# Altium PCB 2 Layers PCB.PcbDoc (part 2 of 2)
Units mm, origin at the board's own origin, x right, y up, seen from the top; angles counter-clockwise.
Board outline 126.36 x 110.87 mm, 2 copper layers (Top Layer, Bottom Layer), stack 1.569 mm thick; 108 components, 114 nets, 540 pads, 148 vias.
Unrouted connection lines stored in the file: 192.
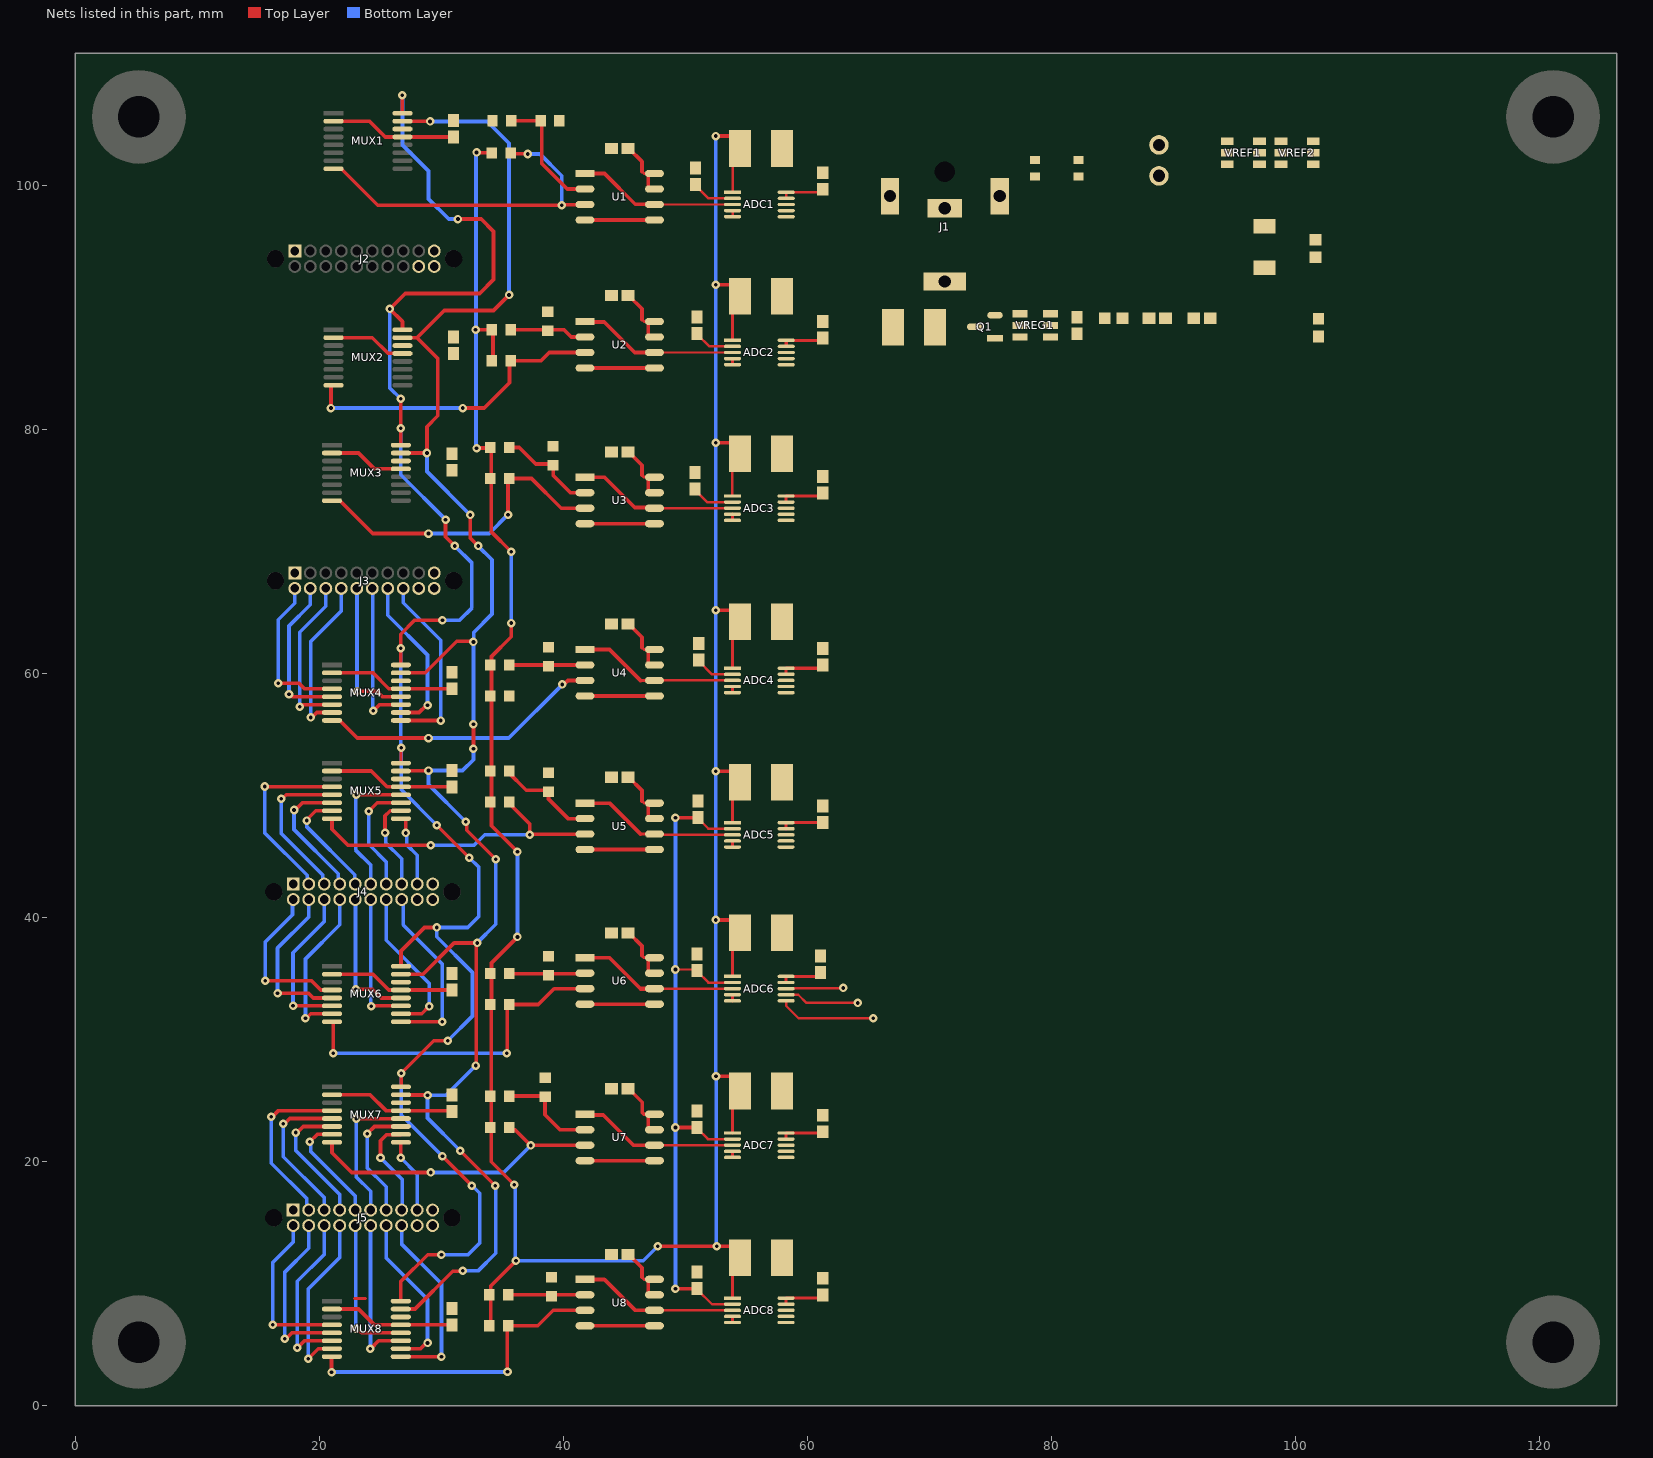
[diagram p2: the nets of this part, all layers, seen from the top]

## Via types
v1: diameter 0.7, hole 0.3, Top Layer to Bottom Layer, 148 vias

## Nets (pads, with @x,y where several pads share a name; then routed paths per layer and width w, separated by ;. In a path a pad name is that pad's centre, name@x,y a point inside that pad or via, vN(x,y) a via of type N, cw(c..) or ccw(c..) an arc to the next point about the centre after c; other vN are vias at no path point) (continued)
D1: MUX1.16 MUX2.16 MUX3.16 MUX4.16 MUX5.16 MUX6.16 MUX7.16 MUX8.16 | length 148.9
  Top Layer w0.25: MUX5.16@26.694,52.682 26.716,52.682 v1(26.716,53.939)
  Top Layer w0.3: v1(26.67,82.55) v1(26.67,80.137) 26.67,78.775 MUX3.16@26.693,78.752 ; MUX8.16@26.686,8.574 26.686,10.176 28.891,12.381 v1(30.018,12.381) ; MUX4.16@26.693,60.729 26.67,60.752 v1(26.67,62.103) 26.67,63.246 27.813,64.389 v1(30.099,64.389) ; MUX7.16@26.694,26.141 26.724,26.171 v1(26.724,27.251) 29.391,29.918 v1(30.534,29.918) ; MUX6.16@26.694,36.029 26.694,37.28 28.621,39.207 v1(29.637,39.207) ; v1(26.797,107.442) 26.797,105.987 MUX1.16@26.82,105.964 ; MUX2.16@26.82,88.211 26.82,88.877 v1(25.781,89.916) 27.051,91.186 33.147,91.186 34.29,92.329 34.29,96.266 33.274,97.282 v1(31.369,97.282) ; v1(29.637,47.589) v1(32.304,44.922) ; v1(30.099,20.447) v1(32.512,18.034) ; v1(30.353,72.644) 30.353,71.247 v1(31.115,70.485)
  Bottom Layer w0.3: v1(25.781,89.916) 25.781,83.439 v1(26.67,82.55) ; v1(26.67,62.103) 26.693,62.08 26.693,53.962 v1(26.716,53.939) 26.716,50.51 v1(29.637,47.589) ; v1(26.67,80.137) 26.67,76.327 v1(30.353,72.644) ; v1(26.724,27.251) 26.724,23.822 v1(30.099,20.447) ; v1(26.797,107.442) 26.82,107.419 26.82,103.363 28.956,101.227 28.956,98.933 30.607,97.282 v1(31.369,97.282) ; v1(30.018,12.381) 32.193,12.381 33.147,13.335 33.147,17.418 32.531,18.034 v1(32.512,18.034) ; v1(30.099,64.389) 31.496,64.389 32.512,65.405 32.512,69.088 v1(31.115,70.485) ; v1(30.534,29.918) 32.566,31.95 32.566,35.506 29.637,38.435 v1(29.637,39.207) 32.177,39.207 33.066,40.096 33.066,44.16 v1(32.304,44.922)
D2: MUX1.15 MUX2.15 MUX3.15 MUX4.15 MUX5.15 MUX6.15 MUX7.15 MUX8.15 | length 152.6
  Top Layer w0.25: MUX6.15@26.694,35.379 MUX6.15@26.71,35.395 ; v1(32.82,27.886) v1@32.88,27.946 ; v1@32.88,37.877 v1(32.939,37.937)
  Top Layer w0.3: MUX8.15@26.686,7.924 27.847,7.924 30.95,11.027 31.728,11.027 v1(31.75,11.049) ; MUX4.15@26.693,60.079 28.683,60.079 31.267,62.663 32.587,62.663 v1(32.639,62.611) ; MUX3.15@26.693,78.102 26.695,78.103 28.827,78.103 v1(28.829,78.105) 28.829,80.264 29.718,81.153 29.718,85.852 28.009,87.561 ; MUX7.15@26.694,25.491 26.709,25.476 v1@28.86,25.476 ; MUX6.15@26.694,35.379 28.496,35.379 31.054,37.937 v1(32.939,37.937) ; MUX5.15@26.694,52.032 26.71,52.048 28.934,52.048 v1(28.956,52.07) ; MUX2.15@26.82,87.561 28.009,87.561 ; MUX1.15@26.82,105.314 26.835,105.298 29.068,105.298 v1(29.083,105.283) ; v1(31.55,20.901) v1(34.417,18.034) ; v1(32.004,47.879) 32.081,47.802 32.081,47.178 v1(34.463,44.795) ; v1(32.385,73.025) 32.385,71.134 33.02,70.499 v1(33.02,70.485) ; v1(32.639,53.848) v1(32.639,55.88) ; v1@32.88,27.946 v1@32.88,37.877 ; v1(35.56,91.059) 34.29,89.789 30.237,89.789 28.009,87.561
  Bottom Layer w0.3: v1(28.829,78.105) 28.829,76.581 v1(32.385,73.025) ; v1(29.083,105.283) 33.782,105.283 35.56,103.505 v1(35.56,91.059) ; v1(31.55,20.901) 28.875,23.576 v1(28.875,25.462) 30.395,25.462 v1(32.82,27.886) ; v1(31.75,11.049) 33.02,11.049 34.471,12.5 v1@34.471,17.98 ; v1(32.004,47.879) 28.956,50.927 v1(28.956,52.07) 31.75,52.07 32.639,52.959 v1(32.639,53.848) ; v1(32.639,55.88) v1(32.639,62.611) 32.677,62.649 32.677,63.411 34.163,64.897 34.163,69.342 v1(33.02,70.485) ; v1(32.939,37.937) 34.463,39.461 v1(34.463,44.795)
D3: ADC2.6
D4: ADC4.6
D5: ADC6.6 | length 8
  Top Layer w0.2: ADC6.6@58.274,33.191 58.274,32.785 59.309,31.75 v1(65.405,31.75)
D6: ADC8.6
D7: ADC7.6
D8: ADC5.6
D9: ADC3.6
D10: ADC1.6
E1: J3.2 MUX4.4 | length 13
  Top Layer w0.25: MUX4.4@21.042,58.779 MUX4.4@21.104,58.779
  Top Layer w0.3: v1(16.629,59.22) 18.34,59.22 18.781,58.779 MUX4.4@21.042,58.779
  Bottom Layer w0.3: v1(16.629,59.22) 16.629,64.427 17.994,65.792 J3.2@17.994,67.002
E2: J3.4 MUX4.5 | length 13
  Top Layer w0.25: v1(17.518,58.331) 17.604,58.331 17.806,58.129
  Top Layer w0.3: 17.806,58.129 MUX4.5@21.042,58.129
  Bottom Layer w0.3: v1(17.518,58.331) 17.518,63.919 19.264,65.665 J3.4@19.264,67.002
E3: J3.6 MUX4.6 | length 13.3
  Top Layer w0.25: v1(18.407,57.315) 18.493,57.315 v1@18.657,57.479
  Top Layer w0.3: v1@18.657,57.479 MUX4.6@21.042,57.479
  Bottom Layer w0.3: v1(18.407,57.315) 18.407,63.411 20.534,65.538 J3.6@20.534,67.002
E4: J3.8 MUX4.7 | length 13.5
  Top Layer w0.25: v1(19.296,56.426) v1@19.382,56.426
  Top Layer w0.3: v1@19.382,56.426 19.785,56.829 MUX4.7@21.042,56.829
  Bottom Layer w0.3: v1(19.296,56.426) 19.296,62.649 21.804,65.157 J3.8@21.804,67.002
E5: J3.10 MUX4.12 | length 12.2
  Top Layer w0.3: v1(23.101,58.585) 24.732,58.585 25.188,58.129 MUX4.12@26.693,58.129
  Bottom Layer w0.25: J3.10@23.074,67.002 J3.10@23.088,66.989 ; v1@23.088,58.598 v1(23.101,58.585)
  Bottom Layer w0.3: v1@23.088,58.598 J3.10@23.088,66.989
E6: J3.12 MUX4.11 | length 12.5
  Top Layer w0.25: v1(24.438,56.969) v1@24.444,56.969
  Top Layer w0.3: v1@24.444,56.969 24.954,57.479 MUX4.11@26.693,57.479
  Bottom Layer w0.25: J3.12@24.344,67.002 J3.12@24.391,66.955 ; v1@24.391,57.016 v1(24.438,56.969)
  Bottom Layer w0.3: v1@24.391,57.016 J3.12@24.391,66.955
E7: J3.14 MUX4.10 | length 13.4
  Top Layer w0.25: v1@28.788,57.434 v1(28.874,57.434)
  Top Layer w0.3: MUX4.10@26.693,56.829 28.183,56.829 v1@28.788,57.434
  Bottom Layer w0.3: J3.14@25.614,67.002 25.614,64.81 28.874,61.55 v1(28.874,57.434)
E8: J3.16 MUX4.9 | length 15.4
  Top Layer w0.25: v1@29.957,56.179 v1(29.964,56.172)
  Top Layer w0.3: MUX4.9@26.693,56.179 v1@29.957,56.179
  Bottom Layer w0.3: J3.16@26.884,67.002 26.884,65.826 29.964,62.746 v1(29.964,56.172)
F1: J4.3 MUX5.4 | length 15
  Top Layer w0.25: v1(15.54,50.764) v1@15.572,50.732
  Top Layer w0.3: v1@15.572,50.732 MUX5.4@21.043,50.732
  Bottom Layer w0.25: J4.3@19.008,42.893 J4.3@19.138,42.763
  Bottom Layer w0.3: v1(15.54,50.764) 15.54,46.954 19.008,43.486 J4.3@19.008,42.893
F2: J4.5 MUX5.5 | length 12.7
  Top Layer w0.25: v1(16.884,49.756) v1@16.97,49.756
  Top Layer w0.3: v1@16.97,49.756 17.296,50.082 MUX5.5@21.043,50.082
  Bottom Layer w0.25: J4.5@20.278,42.893 J4.5@20.408,42.763
  Bottom Layer w0.3: v1(16.884,49.756) 16.884,46.9 20.278,43.506 J4.5@20.278,42.893
F3: J4.7 MUX5.6 | length 11
  Top Layer w0.25: v1(17.932,48.835) v1@18.018,48.835
  Top Layer w0.3: v1@18.018,48.835 18.616,49.432 MUX5.6@21.043,49.432
  Bottom Layer w0.25: J4.7@21.548,42.893 J4.7@21.678,42.763
  Bottom Layer w0.3: v1(17.932,48.835) 17.932,47.23 21.548,43.613 J4.7@21.548,42.893
F4: J4.9 MUX5.7 | length 9.3
  Top Layer w0.25: v1(18.969,47.97) v1@18.969,48.032
  Top Layer w0.3: v1@18.969,48.032 19.72,48.782 MUX5.7@21.043,48.782
  Bottom Layer w0.25: v1(18.969,47.97) v1@18.986,47.954 ; J4.9@22.911,42.801 J4.9@22.948,42.763
  Bottom Layer w0.3: v1@18.986,47.954 18.986,47.446 22.911,43.521 J4.9@22.911,42.801
F5: J4.11 MUX5.12 | length 11.5
  Top Layer w0.3: v1(23.035,50.082) MUX5.12@26.694,50.082
  Bottom Layer w0.25: v1@22.98,50.027 v1(23.035,50.082)
  Bottom Layer w0.3: v1@22.98,50.027 22.98,45.565 24.218,44.327 J4.11@24.218,42.763
F6: J4.13 MUX5.11 | length 9.5
  Top Layer w0.3: v1(24.049,48.732) 24.749,49.432 MUX5.11@26.694,49.432
  Bottom Layer w0.3: v1(24.049,48.732) 24.049,46.019 25.488,44.581 J4.13@25.488,42.763
F7: J4.15 MUX5.10 | length 7.6
  Top Layer w0.3: v1(25.393,46.962) 25.393,48.36 25.814,48.782 MUX5.10@26.694,48.782
  Bottom Layer w0.25: v1(25.393,46.962) v1@25.454,46.901
  Bottom Layer w0.3: v1@25.454,46.901 25.454,46.139 26.758,44.835 J4.15@26.758,42.763
F8: J4.17 MUX5.9 | length 6.2
  Top Layer w0.25: MUX5.9@26.694,48.132 MUX5.9@27.097,48.132
  Top Layer w0.3: v1(27.097,46.954) MUX5.9@27.097,48.132
  Bottom Layer w0.25: v1(27.097,46.954) v1@27.159,46.893
  Bottom Layer w0.3: v1@27.159,46.893 27.159,46.004 28.028,45.134 J4.17@28.028,42.763
G1: J4.2 MUX6.4 | length 13.4
  Top Layer w0.3: v1(15.563,34.825) 19.373,34.825 20.119,34.079 MUX6.4@21.043,34.079
  Bottom Layer w0.25: J4.2@17.8,41.425 J4.2@17.868,41.493
  Bottom Layer w0.3: v1(15.563,34.825) 15.563,38.021 17.8,40.258 J4.2@17.8,41.425
G2: J4.4 MUX6.5 | length 13.4
  Top Layer w0.3: v1(16.579,33.809) 19.119,33.809 19.499,33.429 MUX6.5@21.043,33.429
  Bottom Layer w0.25: J4.4@19.133,41.488 J4.4@19.138,41.493
  Bottom Layer w0.3: v1(16.579,33.809) 16.579,37.513 19.133,40.068 J4.4@19.133,41.488
G3: J4.6 MUX6.6 | length 13
  Top Layer w0.25: v1(17.849,32.793) v1@17.863,32.779
  Top Layer w0.3: v1@17.863,32.779 MUX6.6@21.043,32.779
  Bottom Layer w0.3: v1(17.849,32.793) 17.849,37.132 20.408,39.692 J4.6@20.408,41.493
G4: J4.8 MUX6.7 | length 13.2
  Top Layer w0.25: v1(18.865,31.777) v1@18.951,31.777
  Top Layer w0.3: v1@18.951,31.777 19.303,32.129 MUX6.7@21.043,32.129
  Bottom Layer w0.3: v1(18.865,31.777) 18.865,36.624 21.678,39.438 J4.8@21.678,41.493
G5: J4.10 MUX6.12 | length 11.4
  Top Layer w0.3: v1(22.98,34.135) 24.377,34.135 25.083,33.429 MUX6.12@26.694,33.429
  Bottom Layer w0.25: J4.10@22.948,41.493 J4.10@22.964,41.478 ; v1@22.964,34.151 v1(22.98,34.135)
  Bottom Layer w0.3: v1@22.964,34.151 J4.10@22.964,41.478
G6: J4.12 MUX6.11 | length 11.2
  Top Layer w0.25: v1(24.25,32.738) v1@24.291,32.779
  Top Layer w0.3: v1@24.291,32.779 MUX6.11@26.694,32.779
  Bottom Layer w0.25: J4.12@24.218,41.493 J4.12@24.234,41.478 ; v1@24.234,32.754 v1(24.25,32.738)
  Bottom Layer w0.3: v1@24.234,32.754 J4.12@24.234,41.478
G7: J4.14 MUX6.10 | length 12.8
  Top Layer w0.3: MUX6.10@26.694,32.129 28.401,32.129 v1(29.002,32.73)
  Bottom Layer w0.3: J4.14@25.488,41.493 25.488,38.149 29.002,34.635 v1(29.002,32.73)
G8: J4.16 MUX6.9 | length 14.8
  Top Layer w0.3: MUX6.9@26.694,31.479 v1@30.092,31.479
  Bottom Layer w0.25: J4.16@26.758,41.493 J4.16@26.888,41.363
  Bottom Layer w0.3: J4.16@26.888,41.363 26.888,39.416 30.092,36.213 v1(30.092,31.468)
GND: ADC1.4 ADC1.5 ADC2.4 ADC2.5 ADC3.4 ADC3.5 ADC4.4 ADC4.5 ADC5.4 ADC5.5 ADC6.4 ADC6.5 ADC7.4 ADC7.5 ADC8.4 ADC8.5 C1.1 C2.1 C3.1 C4.2 C5.1 C6.2 C7.1 C8.1 C9.1 C10.2 C11.1 C12.2 C13.1 C14.1 C15.1 C16.2 C17.1 C18.2 C19.1 C20.1 C21.1 C22.1 C23.2 C24.2 C26.2 C28.1 C30.1 C31.1 C32.1 C33.1 C34.1 C35.1 C36.1 C37.1 C38.1 C39.1 C40.1 C41.1 C42.1 C43.1 C44.1 C45.1 J1.1 J1.3 J1.4 J2.1 J2.18 J2.19 J2.20 J3.1 J3.18 J3.19 J3.20 J4.1 J4.18 J4.19 J4.20 J5.1 J5.18 J5.19 J5.20 LED1.1 MUX1.14 MUX2.14 MUX3.14 MUX4.14 MUX5.14 MUX6.14 MUX7.14 MUX8.14 Q1.1 R2.1 R3.2 R6.2 R9.2 R12.2 R15.2 R18.2 R21.2 R24.2 R27.2 U1.4 U1.5 U2.4 U2.5 U3.4 U3.5 U4.4 U4.5 U5.4 U5.5 U6.4 U6.5 U7.4 U7.5 U8.4 U8.5 VREG1.2 | length 41.6
  Top Layer w0.2: ADC1.5@53.882,97.478 ADC1.4@53.882,97.978
  Top Layer w0.25: ADC8.5@53.874,6.82 ADC8.4@53.874,7.32 ; ADC7.5@53.874,20.355 ADC7.4@53.874,20.855 ; ADC6.5@53.874,33.191 ADC6.4@53.874,33.691 ; ADC5.5@53.874,45.799 ADC5.4@53.874,46.299 ; ADC4.5@53.874,58.459 ADC4.4@53.874,58.959 ; ADC3.5@53.874,72.582 ADC3.4@53.874,73.082 ; ADC2.5@53.882,85.343 ADC2.4@53.882,85.843
  Top Layer w0.3: U8.4@42.281,6.55 U8.5@46.981,6.55 ; U7.4@42.281,20.085 U7.5@46.981,20.085 ; U6.4@42.281,32.921 U6.5@46.981,32.921 ; U5.4@42.281,45.592 U5.5@46.981,45.592 ; U4.4@42.281,58.189 U4.5@46.981,58.189 ; U3.4@42.281,72.312 U3.5@46.981,72.312 ; U2.4@42.281,85.073 U2.5@46.981,85.073 ; U1.4@42.281,97.208 U1.5@46.981,97.208
H1: J5.3 MUX7.4 | length 14.1
  Top Layer w0.3: v1(16.056,23.695) 16.164,23.695 16.66,24.191 MUX7.4@21.043,24.191
  Bottom Layer w0.3: v1(16.056,23.695) 16.056,19.885 18.985,16.956 18.985,16.187 J5.3@19.13,16.041
H2: J5.5 MUX7.5 | length 12.6
  Top Layer w0.3: v1(17.056,23.12) 17.165,23.12 17.586,23.541 MUX7.5@21.043,23.541
  Bottom Layer w0.3: v1(17.056,23.12) 17.056,20.409 20.4,17.065 J5.5@20.4,16.041
H3: J5.7 MUX7.6 | length 11
  Top Layer w0.3: v1(18.072,22.391) 18.181,22.391 18.681,22.891 MUX7.6@21.043,22.891
  Bottom Layer w0.3: v1(18.072,22.391) 18.072,20.917 21.67,17.319 J5.7@21.67,16.041
H4: J5.9 MUX7.7 | length 9.2
  Top Layer w0.3: v1(19.215,21.629) 19.827,22.241 MUX7.7@21.043,22.241
  Bottom Layer w0.3: v1(19.215,21.629) 19.292,21.553 19.292,20.84 22.94,17.192 J5.9@22.94,16.041
H5: J5.11 MUX7.12 | length 11.7
  Top Layer w0.3: v1(23.018,23.526) 26.679,23.526 MUX7.12@26.694,23.541
  Bottom Layer w0.3: v1(23.018,23.526) 23.018,18.765 24.21,17.573 J5.11@24.21,16.041
H6: J5.13 MUX7.11 | length 9.9
  Top Layer w0.3: v1(23.922,22.287) 24.526,22.891 MUX7.11@26.694,22.891
  Bottom Layer w0.3: v1(23.922,22.287) 23.922,19.512 25.48,17.954 J5.13@25.48,16.041
H7: J5.15 MUX7.10 | length 8.3
  Top Layer w0.3: v1(25.019,20.32) 25.019,21.717 25.528,22.226 26.679,22.226 MUX7.10@26.694,22.241
  Bottom Layer w0.3: v1(25.019,20.32) 26.797,18.542 26.797,16.088 J5.15@26.75,16.041
H8: J5.17 MUX7.9 | length 6.1
  Top Layer w0.3: v1(26.67,20.32) 26.67,21.567 MUX7.9@26.694,21.591
  Bottom Layer w0.3: v1(26.67,20.32) 28.02,18.97 J5.17@28.02,16.041
I1: J5.2 MUX8.4 | length 13.7
  Top Layer w0.3: v1(16.186,6.624) MUX8.4@21.035,6.624
  Bottom Layer w0.3: v1(16.186,6.624) 16.186,11.741 17.86,13.415 J5.2@17.86,14.771
I2: J5.4 MUX8.5 | length 14.1
  Top Layer w0.3: v1(17.183,5.5) 17.292,5.5 17.766,5.974 MUX8.5@21.035,5.974
  Bottom Layer w0.3: v1(17.183,5.5) 17.183,10.96 19.13,12.907 J5.4@19.13,14.771
I3: J5.6 MUX8.6 | length 14
  Top Layer w0.3: v1(18.199,4.738) 18.785,5.324 MUX8.6@21.035,5.324
  Bottom Layer w0.3: v1(18.199,4.738) 18.199,10.198 20.4,12.399 J5.6@20.4,14.771
I4: J5.8 MUX8.7 | length 14.3
  Top Layer w0.3: v1(19.088,3.849) 19.913,4.674 MUX8.7@21.035,4.674
  Bottom Layer w0.3: v1(19.088,3.849) 19.088,9.563 21.67,12.145 J5.8@21.67,14.771
I5: J5.10 MUX8.12 | length 13.2
  Top Layer w0.25: 22.9,8.791 23.789,8.791
  Top Layer w0.3: v1(23.041,6.296) 23.149,6.296 23.471,5.974 MUX8.12@26.686,5.974
  Bottom Layer w0.3: J5.10@22.94,14.771 22.991,14.721 22.991,6.346 v1(23.041,6.296)
I6: J5.12 MUX8.11 | length 12.9
  Top Layer w0.3: v1(24.193,4.654) 24.863,5.324 MUX8.11@26.686,5.324
  Bottom Layer w0.3: v1(24.193,4.654) 24.202,4.663 24.202,14.763 J5.12@24.21,14.771
I7: J5.14 MUX8.10 | length 13.4
  Top Layer w0.3: MUX8.10@26.686,4.674 28.299,4.674 28.767,5.142 v1(28.875,5.142)
  Bottom Layer w0.3: J5.14@25.48,14.771 25.48,12.112 28.875,8.717 v1(28.875,5.142)
I8: J5.16 MUX8.9 | length 15.5
  Top Layer w0.3: MUX8.9@26.686,4.024 26.699,4.011 30.005,4.011 v1(30.018,3.999)
  Bottom Layer w0.3: J5.16@26.75,14.771 26.75,13.255 30.018,9.987 v1(30.018,3.999)
MISO: ADC1.7 ADC2.7 ADC3.7 ADC4.7 ADC5.7 ADC6.7 ADC7.7 ADC8.7 | length 6.1
  Top Layer w0.2: ADC6.7@58.274,33.691 59.273,33.691 59.944,33.02 v1(64.135,33.02)
MOSI: 
NetADC1_1: ADC1.1 ADC2.1 ADC3.1 ADC4.1 ADC5.1 ADC6.1 ADC7.1 ADC8.1 C3.2 C5.2 C9.2 C11.2 C15.2 C17.2 C21.2 C22.2 R5.1 R7.1 R8.1 R10.1 R11.1 R13.1 R14.1 R16.1 R17.1 R19.1 R20.1 R22.1 R23.1 R25.1 R26.1 R28.1 VREF1.1 | length 265.7
  Top Layer w0.2: ADC3.1@53.874,74.582 53.874,77.425 C9.2@54.476,78.027 ; ADC1.1@53.882,99.478 53.882,102.475 C3.2@54.476,103.069
  Top Layer w0.25: ADC8.1@53.874,8.82 53.874,11.536 C22.2@54.476,12.138 ; ADC7.1@53.874,22.355 53.874,25.198 C21.2@54.476,25.8 ; ADC6.1@53.874,35.191 53.874,38.16 C17.2@54.476,38.762 ; ADC5.1@53.874,47.799 53.874,50.525 C15.2@54.476,51.127 ; ADC4.1@53.874,60.459 53.874,63.683 C11.2@54.476,64.285 ; ADC2.1@53.882,87.343 53.882,90.346 C5.2@54.476,90.94
  Top Layer w0.3: v1@32.816,88.207 34.236,88.207 34.24,88.211 R10.1@34.24,85.671 ; v1(32.893,78.486) 32.925,78.518 34.081,78.518 34.113,78.55 34.113,76.01 34.113,71.626 v1(35.732,70.007) ; v1(32.893,102.743) 32.923,102.713 34.21,102.713 R7.1@34.24,102.684 ; R28.1@34.048,6.55 34.048,9.09 34.048,9.811 v1(36.122,11.884) ; v1(35.732,64.165) 35.732,63.037 34.114,61.419 34.114,58.189 34.114,52.032 34.114,49.492 34.114,47.547 v1(36.249,45.412) ; v1(35.995,18.107) 34.106,19.996 34.106,22.813 34.106,25.369 34.11,25.373 34.11,32.889 34.114,32.893 34.114,35.433 34.114,36.292 v1(36.249,38.427) ; v1(47.752,13.081) v1(52.578,13.081) 53.726,13.081 54.476,12.331 C22.2@54.476,12.138 ; v1(52.505,39.824) 53.726,39.824 54.476,39.074 C17.2@54.476,38.762 ; v1(52.505,52.016) 53.726,52.016 54.476,51.266 C15.2@54.476,51.127 ; v1(52.505,65.224) 53.726,65.224 54.476,64.474 C11.2@54.476,64.285 ; v1(52.505,78.94) 53.726,78.94 54.476,78.19 C9.2@54.476,78.027 ; v1(52.505,91.894) 53.726,91.894 54.476,91.144 C5.2@54.476,90.94 ; v1(52.505,104.086) 53.726,104.086 54.476,103.336 C3.2@54.476,103.069 ; v1(52.526,27.014) 53.726,27.014 54.476,26.264 C21.2@54.476,25.8
  Bottom Layer w0.3: v1@32.852,88.162 32.852,78.527 v1(32.893,78.486) ; v1@32.852,88.243 32.852,102.702 v1(32.893,102.743) ; v1(35.732,64.165) v1(35.732,70.007) ; v1(35.995,18.107) 36.058,18.044 v1@36.058,11.948 ; v1(36.122,11.884) 46.555,11.884 v1(47.752,13.081) ; v1(36.249,38.427) v1(36.249,45.412) ; v1(52.505,104.086) v1(52.505,91.894) v1(52.505,78.94) v1(52.505,65.224) v1(52.505,52.016) v1(52.505,39.824) 52.516,39.813 52.516,27.025 v1(52.526,27.014) 52.552,26.988 52.552,13.107 v1(52.578,13.081)
  other v1: 32.811,88.203
NetADC1_2: ADC1.2 ADC2.2 ADC3.2 ADC4.2 ADC5.2 ADC6.2 ADC7.2 ADC8.2 C1.2 C6.1 C7.2 C12.1 C13.2 C18.1 C20.2 C23.1 VREF2.1 | length 73
  Top Layer w0.2: v1(49.203,35.76) 50.908,35.76 C18.1@50.981,35.687 50.981,35.614 51.904,34.691 ADC6.2@53.874,34.691 ; C7.2@50.8,75.142 50.8,75.069 51.787,74.082 ADC3.2@53.874,74.082 ; C1.2@50.854,100.107 50.854,100.034 51.91,98.978 ADC1.2@53.882,98.978 ; C20.2@50.974,22.806 50.974,22.747 51.866,21.855 ADC7.2@53.874,21.855 ; C23.1@50.981,9.61 50.981,9.537 52.198,8.32 ADC8.2@53.874,8.32 ; C6.1@50.981,87.915 50.981,87.842 51.98,86.843 ADC2.2@53.882,86.843 ; C13.2@51.054,48.218 51.054,48.145 51.9,47.299 ADC5.2@53.874,47.299 ; C12.1@51.108,61.118 51.108,61.045 52.194,59.959 ADC4.2@53.874,59.959
  Top Layer w0.3: v1(49.203,9.598) 50.969,9.598 C23.1@50.981,9.61 ; v1(49.203,22.806) C20.2@50.974,22.806 ; v1(49.203,48.206) C13.2@51.042,48.206
  Bottom Layer w0.3: v1(49.203,9.598) v1(49.203,22.806) v1(49.203,35.76) v1(49.203,48.206)
NetADC1_3: ADC1.3 U1.1 U1.6 | length 12.7
  Top Layer w0.2: U1.6@46.955,98.503 46.981,98.478 ADC1.3@53.882,98.478
  Top Layer w0.3: U1.1@42.281,101.018 42.286,101.013 43.386,101.013 45.896,98.503 U1.6@46.955,98.503
NetADC1_9: ADC1.9 ADC1.10 ADC2.9 ADC2.10 ADC3.9 ADC3.10 ADC4.9 ADC4.10 ADC5.9 ADC5.10 ADC6.9 ADC6.10 ADC7.9 ADC7.10 ADC8.9 ADC8.10 C2.2 C4.1 C8.2 C10.1 C14.2 C16.1 C19.2 C24.1 C25.2 C28.2 C29.2 C30.2 C31.2 C32.2 C33.2 C34.2 C35.2 C36.2 C37.2 C38.2 C39.2 C40.2 C41.2 C42.2 C43.2 C44.2 C45.2 L1.2 MUX1.2 MUX1.13 MUX2.2 MUX2.13 MUX3.2 MUX3.13 MUX4.2 MUX4.13 MUX5.2 MUX5.13 MUX6.2 MUX6.13 MUX7.2 MUX7.13 MUX8.2 MUX8.13 R1.2 R4.1 U1.7 U1.8 U2.7 U2.8 U3.7 U3.8 U4.7 U4.8 U5.7 U5.8 U6.7 U6.8 U7.7 U7.8 U8.7 U8.8 VREF1.2 VREF1.3 VREF1.4 VREF1.5 VREF2.4 VREF2.6 | length 137.6
  Top Layer w0.2: ADC1.9@58.282,98.978 ADC1.10@58.282,99.478 61.032,99.478 C4.1@61.281,99.726
  Top Layer w0.25: C45.2@45.308,12.392 C45.2@45.381,12.392 ; C41.2@45.308,38.762 C41.2@45.381,38.762 ; C39.2@45.308,51.516 C39.2@45.381,51.516 ; C37.2@45.308,64.081 C37.2@45.381,64.081 ; C35.2@45.308,78.178 C35.2@45.381,78.178 ; C33.2@45.308,91.005 C33.2@45.381,91.005 ; C31.2@45.308,103.069 C31.2@45.381,103.069 ; 46.456,10.522 46.617,10.36 U8.8@46.981,10.36 ; 46.456,36.893 46.617,36.731 U6.8@46.981,36.731 ; 46.456,49.564 46.617,49.402 U5.8@46.981,49.402 ; 46.456,62.16 46.617,61.999 U4.8@46.981,61.999 ; 46.456,76.283 46.617,76.122 U3.8@46.981,76.122 ; 46.456,89.045 46.617,88.883 U2.8@46.981,88.883 ; 46.456,101.179 46.617,101.018 U1.8@46.981,101.018 ; ADC8.9@58.274,8.32 ADC8.10@58.274,8.82 61.011,8.82 C19.2@61.281,9.09 ; ADC7.9@58.274,21.855 ADC7.10@58.274,22.355 61.18,22.355 C24.1@61.281,22.456 ; ADC6.9@58.274,34.691 ADC6.10@58.274,35.191 60.76,35.191 C14.2@61.087,35.518 ; ADC5.9@58.274,47.299 ADC5.10@58.274,47.799 C16.1@61.281,47.799 ; ADC4.9@58.274,59.959 ADC4.10@58.274,60.459 61.011,60.459 C8.2@61.281,60.729 ; ADC3.9@58.274,74.082 ADC3.10@58.274,74.582 61.029,74.582 C10.1@61.281,74.834 ; ADC2.9@58.282,86.843 ADC2.10@58.282,87.343 61.095,87.343 C2.2@61.281,87.529
  Top Layer w0.3: MUX8.2@21.035,7.924 23.218,7.924 24.518,6.624 MUX8.13@26.686,6.624 C44.2@30.88,6.624 ; MUX4.2@21.042,60.079 24.406,60.079 25.706,58.779 MUX4.13@26.693,58.779 C40.2@30.887,58.779 ; MUX3.2@21.042,78.102 23.225,78.102 24.525,76.802 MUX3.13@26.693,76.802 ; MUX7.2@21.043,25.491 24.166,25.491 25.466,24.191 30.802,24.191 C42.2@30.88,24.113 ; MUX6.2@21.043,35.379 24.403,35.379 25.703,34.079 MUX6.13@26.694,34.079 C36.2@30.888,34.079 ; MUX5.2@21.043,52.032 24.26,52.032 25.56,50.732 MUX5.13@26.694,50.732 C38.2@30.888,50.732 ; MUX2.2@21.169,87.561 24.347,87.561 25.632,86.277 26.805,86.277 MUX2.13@26.82,86.261 ; MUX1.2@21.169,105.314 24.099,105.314 25.399,104.014 MUX1.13@26.82,104.014 C30.2@31.014,104.014 ; C43.2@45.308,25.981 45.381,25.981 46.481,24.881 46.481,24.034 46.619,23.895 46.981,23.895 U7.7@46.981,22.625 ; C45.2@45.381,12.392 46.456,11.317 46.456,10.522 ; C41.2@45.381,38.762 46.456,37.687 46.456,36.893 ; C39.2@45.381,51.516 46.456,50.441 46.456,49.564 ; C37.2@45.381,64.081 46.456,63.006 46.456,62.16 ; C35.2@45.381,78.178 46.456,77.103 46.456,76.283 ; C33.2@45.381,91.005 46.456,89.93 46.456,89.045 ; C31.2@45.381,103.069 46.456,101.994 46.456,101.179 ; U8.7@46.981,9.09 U8.8@46.981,10.36 ; U6.7@46.981,35.461 U6.8@46.981,36.731 ; U5.7@46.981,48.132 U5.8@46.981,49.402 ; U4.7@46.981,60.729 U4.8@46.981,61.999 ; U3.7@46.981,74.852 U3.8@46.981,76.122 ; U2.7@46.981,87.613 U2.8@46.981,88.883 ; U1.7@46.981,99.748 U1.8@46.981,101.018
NetADC2_3: ADC2.3 U2.1 U2.6 | length 12.7
  Top Layer w0.2: U2.6@46.981,86.343 ADC2.3@53.882,86.343
  Top Layer w0.3: U2.1@42.281,88.883 42.315,88.849 43.358,88.849 45.864,86.343 U2.6@46.981,86.343
NetADC3_3: ADC3.3 U3.1 U3.6 | length 12.6
  Top Layer w0.2: U3.6@46.981,73.582 ADC3.3@53.874,73.582
  Top Layer w0.3: U3.1@42.281,76.122 42.284,76.119 43.388,76.119 45.868,73.639 46.923,73.639 U3.6@46.981,73.582
NetADC4_3: ADC4.3 U4.1 U4.6 | length 12.6
  Top Layer w0.2: U4.6@46.981,59.459 ADC4.3@53.874,59.459
  Top Layer w0.25: 46.331,59.459 U4.6@46.981,59.459
  Top Layer w0.3: U4.1@42.281,61.999 43.791,61.999 46.331,59.459
NetADC5_3: ADC5.3 U5.1 U5.6 | length 12.7
  Top Layer w0.2: U5.6@46.981,46.862 47.028,46.815 53.859,46.815 ADC5.3@53.874,46.799
  Top Layer w0.25: 46.331,46.862 U5.6@46.981,46.862
  Top Layer w0.3: U5.1@42.281,49.402 43.791,49.402 46.331,46.862
NetADC6_3: ADC6.3 U6.1 U6.6 | length 12.6
  Top Layer w0.2: U6.6@46.981,34.191 ADC6.3@53.874,34.191
  Top Layer w0.3: U6.1@42.281,36.731 43.802,36.731 46.342,34.191
  Top Layer w0.381: 46.342,34.191 U6.6@46.981,34.191
NetADC7_3: ADC7.3 U7.1 U7.6 | length 12.6
  Top Layer w0.2: U7.6@46.981,21.355 ADC7.3@53.874,21.355
  Top Layer w0.3: U7.1@42.281,23.895 42.338,23.838 43.283,23.838 45.766,21.355 U7.6@46.981,21.355
NetADC8_3: ADC8.3 U8.1 U8.6 | length 12.6
  Top Layer w0.2: U8.6@46.981,7.82 ADC8.3@53.874,7.82
  Top Layer w0.3: U8.1@42.281,10.36 42.296,10.345 43.376,10.345 45.885,7.836 46.965,7.836 U8.6@46.981,7.82
NetC25_1: C25.1 VREF1.6
NetC26_1: C26.1 Q1.2 VREG1.4 VREG1.5
NetC27_1: C27.1 L1.1 VREG1.6
NetC27_2: C27.2 VREG1.1
NetC29_1: C29.1 VREF2.2 VREF2.3 VREF2.5
NetJ1_2: J1.2 Q1.3
NetLED1_2: LED1.2 R1.1 R2.2
NetMUX1_8: MUX1.8 R7.2 U1.3 | length 29.9
  Top Layer w0.3: MUX1.8@21.169,101.414 21.807,101.414 24.795,98.425 v1(39.878,98.425) 39.904,98.451 42.255,98.451 U1.3@42.281,98.478 ; R7.2@35.577,102.667 35.593,102.684 35.627,102.65 37.05,102.65 v1(37.084,102.616)
  Bottom Layer w0.3: v1(37.084,102.616) 38.1,102.616 39.878,100.838 v1(39.878,98.425)
NetMUX2_8: MUX2.8 R10.2 U2.3 | length 26.3
  Top Layer w0.3: v1(20.955,81.788) 20.955,83.624 20.992,83.661 MUX2.8@21.169,83.661 ; v1(31.75,81.788) 33.528,81.788 35.593,83.853 35.593,85.671 38.173,85.671 38.845,86.343 U2.3@42.281,86.343
  Bottom Layer w0.3: v1(20.955,81.788) v1(31.75,81.788)
NetMUX3_8: MUX3.8 R13.2 U3.3 | length 27
  Top Layer w0.3: MUX3.8@21.042,74.202 21.68,74.202 24.38,71.501 v1(28.956,71.501) ; v1(35.478,73.055) 35.472,73.061 35.472,76.004 35.466,76.01 37.401,76.01 39.829,73.582 U3.3@42.281,73.582
  Bottom Layer w0.3: v1(28.956,71.501) 33.925,71.501 v1(35.478,73.055)
NetMUX4_8: MUX4.8 R16.2 U4.3 | length 23.9
  Top Layer w0.25: MUX4.8@21.009,56.145 MUX4.8@21.042,56.179 ; v1(39.932,59.128) v1@40.054,59.128
  Top Layer w0.3: MUX4.8@21.009,56.145 21.016,56.152 21.706,56.152 23.121,54.737 v1(28.956,54.737) ; v1@40.054,59.128 40.384,59.459 U4.3@42.281,59.459
  Bottom Layer w0.3: v1(28.956,54.737) 35.541,54.737 v1(39.932,59.128)
NetMUX5_8: MUX5.8 R19.2 U5.3 | length 26.5
  Top Layer w0.25: R19.2@35.485,49.475 35.485,49.398 35.672,49.211 R19.2@35.748,49.211 ; v1(37.265,46.809) v1@37.291,46.836 ; U5.3@42.254,46.836 U5.3@42.281,46.862
  Top Layer w0.3: MUX5.8@21.043,48.132 21.043,47.248 22.353,45.938 v1(29.129,45.938) ; R19.2@35.748,49.211 37.265,47.695 v1(37.265,46.809) ; v1@37.291,46.836 U5.3@42.254,46.836
  Bottom Layer w0.3: v1(29.129,45.938) 32.685,45.938 33.556,46.809 v1(37.265,46.809)
NetMUX6_8: MUX6.8 R22.2 U6.3 | length 27.7
  Top Layer w0.25: MUX6.8@21.043,31.479 21.075,31.479 MUX6.8@21.136,31.419
  Top Layer w0.3: v1(21.136,28.902) MUX6.8@21.136,31.419 ; 35.414,29.283 R22.2@35.414,32.785 ; R22.2@35.467,32.893 37.954,32.893 39.252,34.191 U6.3@42.281,34.191
  Bottom Layer w0.3: v1(21.136,28.902) v1(35.36,28.902)
NetMUX7_8: MUX7.8 R25.2 U7.3 | length 26.2
  Top Layer w0.3: MUX7.8@21.043,21.591 21.043,20.74 22.66,19.123 v1(29.137,19.123) ; R25.2@35.459,22.813 35.459,22.807 35.639,22.628 36.046,22.628 v1(37.338,21.336) 37.348,21.346 42.271,21.346 U7.3@42.281,21.355
  Bottom Layer w0.3: v1(29.137,19.123) 35.125,19.123 v1(37.338,21.336)
NetMUX8_8: MUX8.8 R28.2 U8.3 | length 26.9
  Top Layer w0.3: v1(21.009,2.74) 21.009,3.998 MUX8.8@21.035,4.024 ; v1(35.433,2.794) 35.417,2.81 35.417,6.534 35.402,6.55 37.919,6.55 39.189,7.82 U8.3@42.281,7.82
  Bottom Layer w0.3: v1(21.009,2.74) 21.036,2.767 v1@35.406,2.767
NetR3_1: R3.1 R4.2 VREG1.3
NetR5_2: R5.2 R6.1 U1.2 | length 11
  Top Layer w0.3: R5.2@35.656,105.348 38.239,105.348 38.239,101.842 40.333,99.748 U1.2@42.281,99.748
NetR8_2: R8.2 R9.1 U2.2 | length 6.9
  Top Layer w0.3: R8.2@35.593,88.211 38.735,88.211 40.059,88.211 40.657,87.613 U2.2@42.281,87.613
NetR11_2: R11.2 R12.1 U3.2 | length 8.9
  Top Layer w0.3: R11.2@35.466,78.55 36.385,78.55 37.739,77.196 39.17,77.196 39.17,76.273 40.591,74.852 U3.2@42.281,74.852
NetR14_2: R14.2 R15.1 U4.2 | length 6.8
  Top Layer w0.3: R14.2@35.467,60.729 38.78,60.729 U4.2@42.281,60.729
NetR17_2: R17.2 R18.1 U5.2 | length 8.9
  Top Layer w0.25: R17.2@35.467,51.955 R17.2@35.467,52.032 ; R17.2@35.469,52.034 R17.2@35.494,52.059
  Top Layer w0.3: R17.2@35.467,51.955 36.972,50.451 38.789,50.451 38.789,49.73 40.387,48.132 U5.2@42.281,48.132
NetR20_2: R20.2 R21.1 U6.2 | length 6.9
  Top Layer w0.25: R20.2@35.467,35.433 R20.2@35.494,35.406 ; R21.1@38.7,35.406 38.754,35.352 R21.1@38.781,35.379
  Top Layer w0.3: R20.2@35.494,35.406 R21.1@38.7,35.406 ; R21.1@38.781,35.379 38.822,35.42 42.24,35.42 U6.2@42.281,35.461
NetR23_2: R23.2 R24.1 U7.2 | length 8.9
  Top Layer w0.3: R23.2@35.459,25.369 35.481,25.391 38.505,25.391 38.505,23.852 39.732,22.625 U7.2@42.281,22.625
NetR26_2: R26.2 R27.1 U8.2 | length 6.9
  Top Layer w0.3: R26.2@35.402,9.09 39.043,9.09 U8.2@42.281,9.09
SCLK: ADC1.8 ADC2.8 ADC3.8 ADC4.8 ADC5.8 ADC6.8 ADC7.8 ADC8.8 | length 4.7
  Top Layer w0.2: ADC6.8@58.274,34.191 58.289,34.207 62.909,34.207 v1(62.95,34.248)
pads on no net: J1.5 J2. J3. J4. J5. MUX1.3 MUX2.3 MUX3.3 MUX4.3 MUX5.3 MUX6.3 MUX7.3 MUX8.3
copper on no net: | length 474.5
  Top Layer w0.254: 0,0 126.365,0 126.365,110.871 0,110.871 0,0

## Other copper
Top Layer:
  pour cut-out: 0,110.871 0,100.457 10.414,100.457 10.414,110.871
  pour cut-out: 126.365,110.871 115.951,110.871 115.951,100.457 126.365,100.457
  pour cut-out: 126.365,0 126.365,10.414 115.951,10.414 115.951,0
  pour cut-out: 0,0 10.414,0 10.414,10.414 0,10.414

## Text inside footprints (layer, text, board x,y; h text height)
LED1: Top Overlay "K" at 88.457,99.048 h0.76 r270; Mechanical 15 "K" at 88.457,99.048 h0.76 r270